# EAGLE board module_RevD_panelized (EAGLE 9.1.1), part 1 of 2
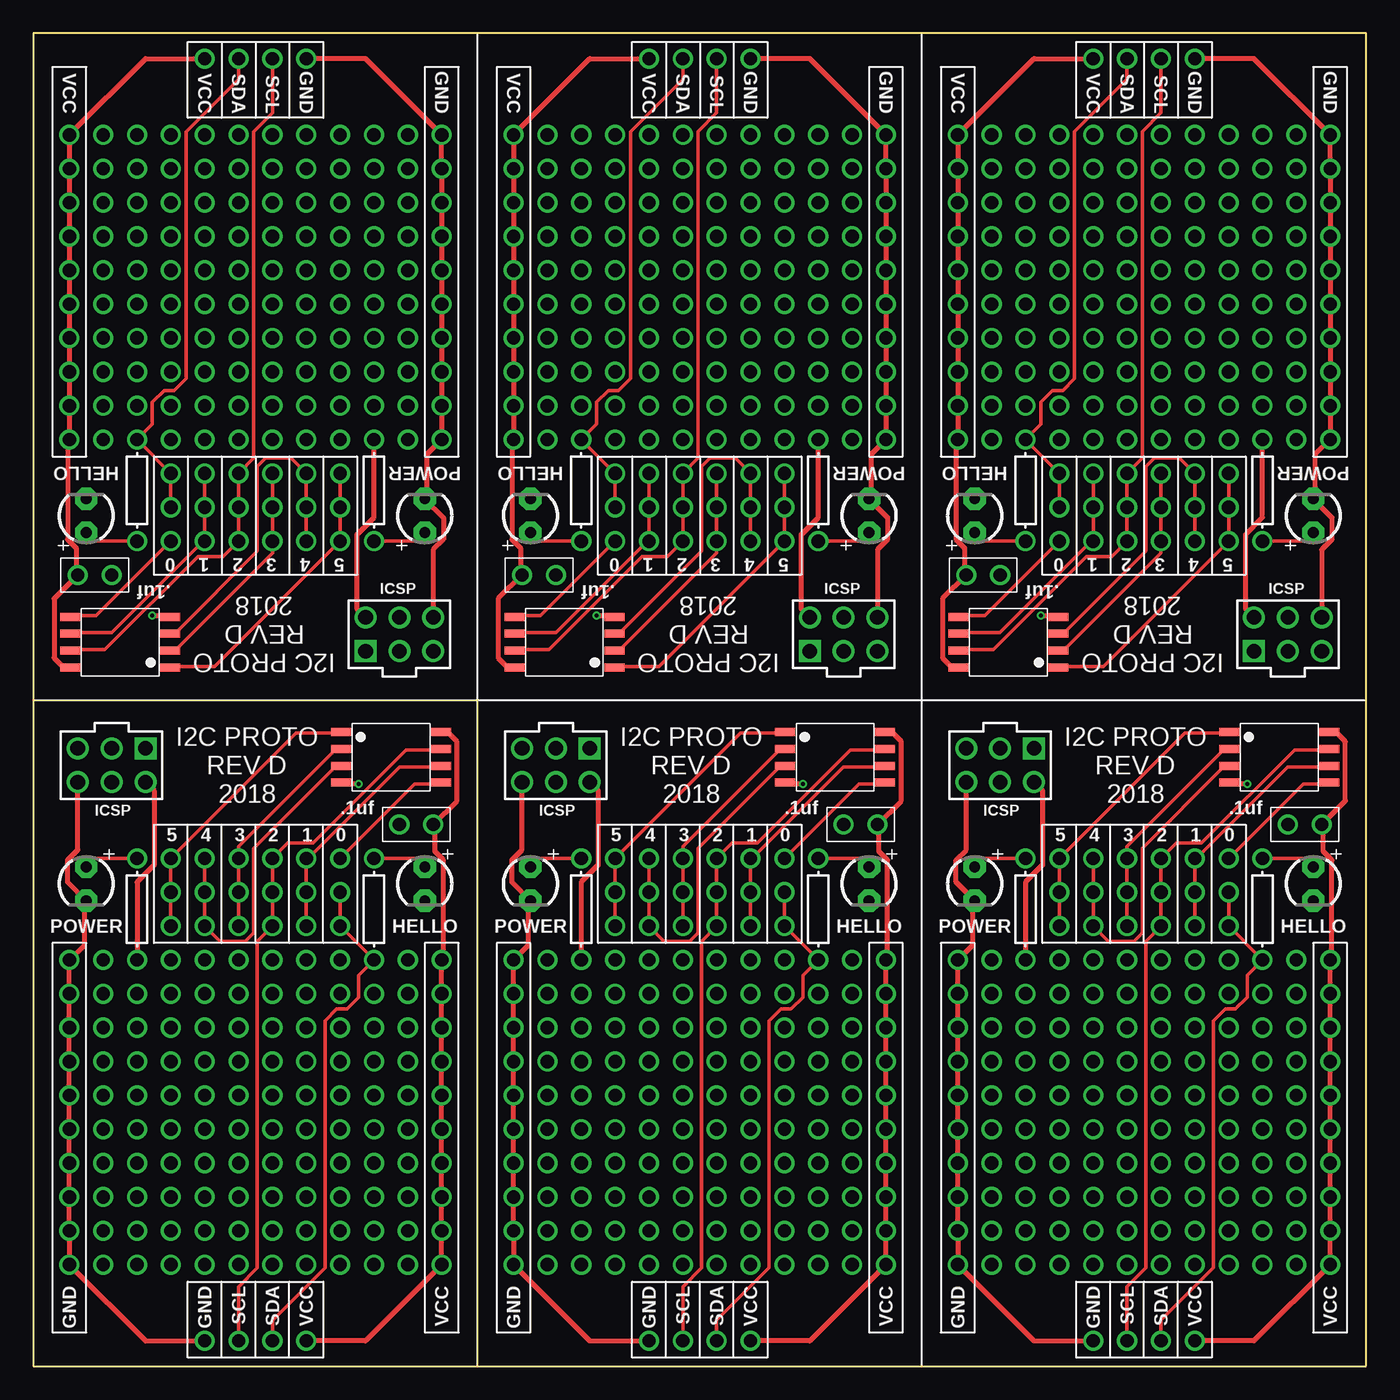
[diagram p0: board, top side]
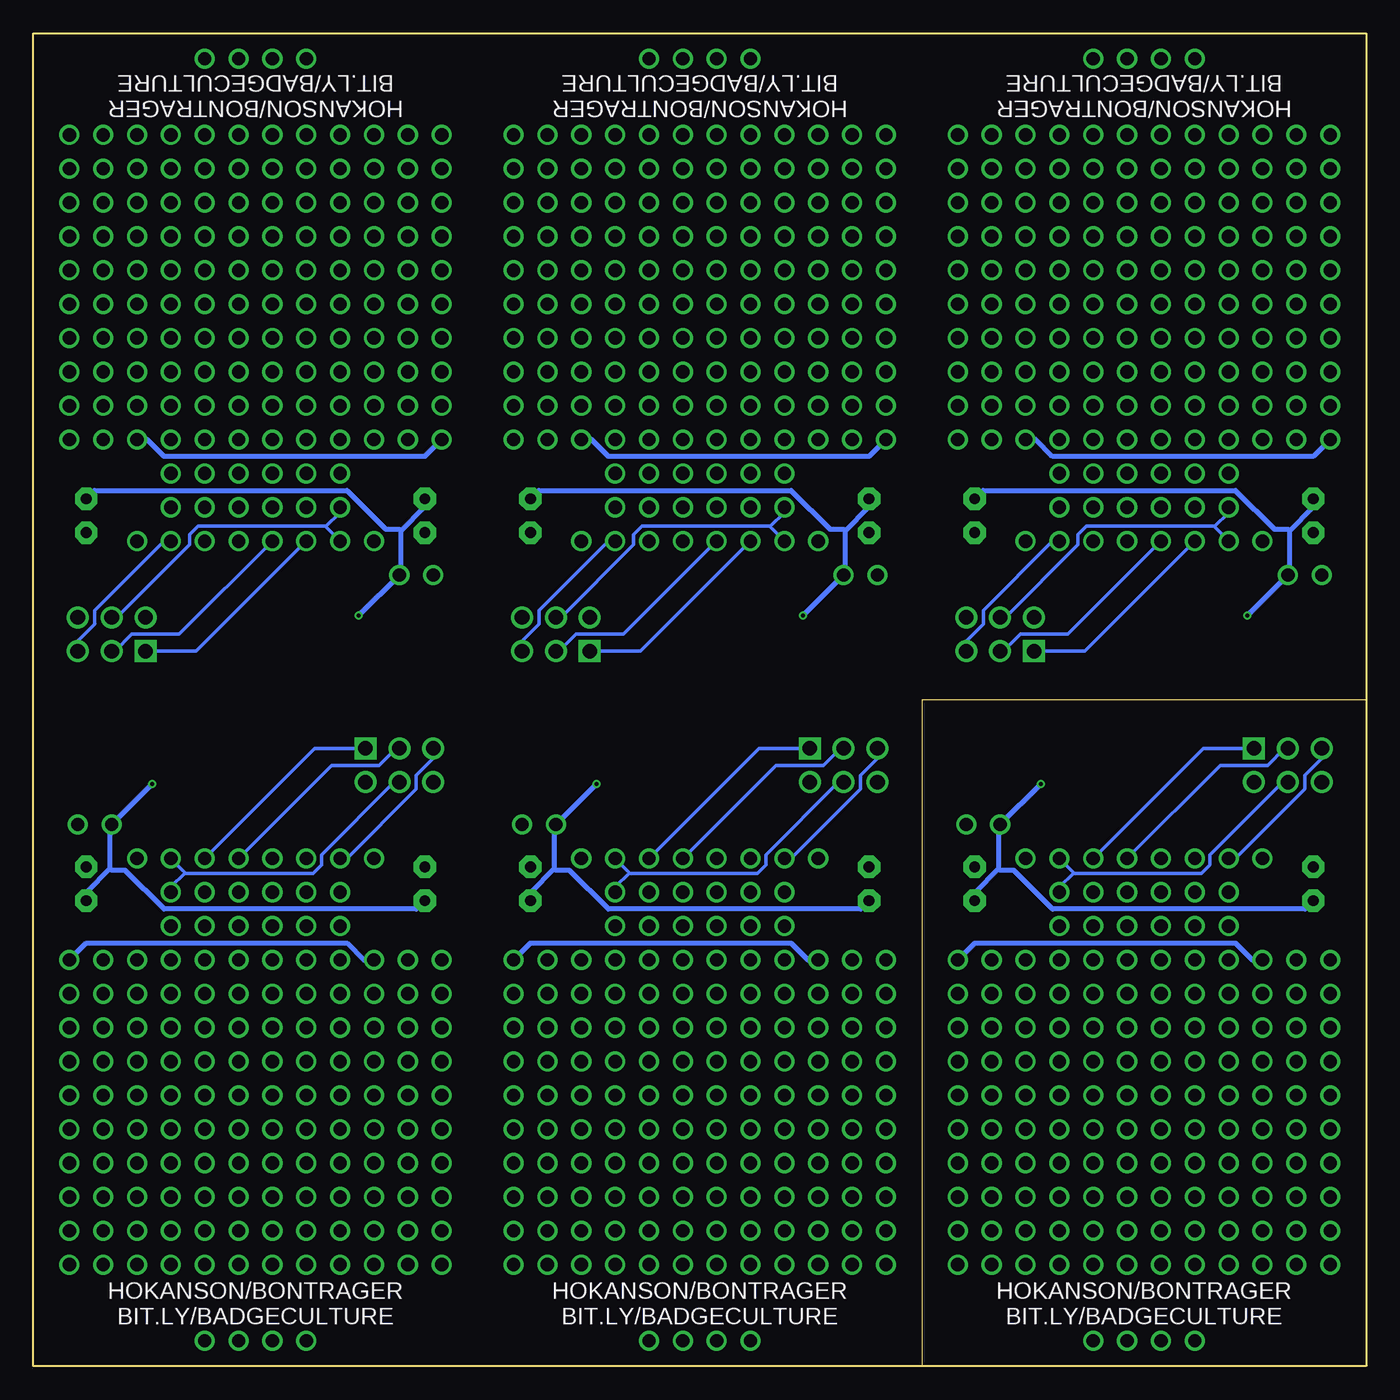
[diagram p1: board, bottom side, seen from below]

Size 100 x 100 mm. Coordinates in mm from the lower left corner, seen from the top.
Outline: 33.33,0 33.33,50 0,50
Outline: 0,0 100,0 100,100 0,100 0,0
Copper layers (1*16): Top 0.035mm / dielectric 1.5mm / Bottom 0.035mm
Design rules "Seeed_40mil_clearance *": minimum track width 6mil, minimum drill 12mil, track to track 6mil, track to pad 6mil, pad to pad 6mil, via to via 6mil, smd to smd 0mil, copper to edge 1.5mm, drill to drill 10mil, minimum pad ring 10mil, minimum via ring 6mil, stop-mask expansion 2mil, vias tented up to drill 100mil, thermal gap 10mil
Net classes: 0 default: width 0.254 mm, clearance 0.254 mm; 1 VCC: width 0.381 mm, clearance 0.254 mm; 2 GND: width 0.381 mm, clearance 0.254 mm

## Footprints (pad centres in the part's own frame; a part is rotated, then mirrored left to right if it is on the bottom)
LED3MM = drill 0.813 pad 1.676 octagon: NEG 1.27,0; POS -1.27,0
SOT127P798X216-8N = smd 1.5 x 0.6: GND -3.75,-1.905; PB0 3.75,-1.905; PB1 3.75,-0.635; PB2 3.75,0.635; PB3 -3.75,0.635; PB4 -3.75,-0.635; PB5 -3.75,1.905; VCC 3.75,1.905
HDRV6W64P254_2X3_762X508X868P = drill 1.1 pad 1.65: 0/MOSI/SDA 0,1.27; 2/SCK/SCL 0,3.81; 5/RST -2.54,3.81; GND -2.54,1.27; VCC 2.54,1.27 | drill 1.1 pad 1.65 square: 1/MISO 2.54,3.81
1X01 = drill 1: P$1 0,0
DECOUPLING_CAP = drill 1: P$1 0,0; P$2 2.54,0
AXIAL-0.3 = drill 1: P$3 -3.81,0; P$4 3.81,0

## Placement (x,y rotation side)
HELLO  LED3MM  [LED3MM]  29.37,36.2 270 top
HELLO1  LED3MM  [LED3MM]  62.7,36.2 270 top
HELLO2  LED3MM  [LED3MM]  96.03,36.2 270 top
HELLO3  LED3MM  [LED3MM]  70.63,63.8 90 top
HELLO4  LED3MM  [LED3MM]  37.3,63.8 90 top
HELLO5  LED3MM  [LED3MM]  3.97,63.8 90 top
IC1  ATTINY85-20SU  [SOT127P798X216-8N]  26.83,45.68 0 top
IC2  ATTINY85-20SU  [SOT127P798X216-8N]  60.16,45.68 0 top
IC3  ATTINY85-20SU  [SOT127P798X216-8N]  93.49,45.68 0 top
IC4  ATTINY85-20SU  [SOT127P798X216-8N]  73.17,54.32 180 top
IC5  ATTINY85-20SU  [SOT127P798X216-8N]  39.84,54.32 180 top
IC6  ATTINY85-20SU  [SOT127P798X216-8N]  6.51,54.32 180 top
J1  M20-9980346  [HDRV6W64P254_2X3_762X508X868P]  5.88,42.55 0 top
J2  M20-9980346  [HDRV6W64P254_2X3_762X508X868P]  39.2,42.55 0 top
J3  M20-9980346  [HDRV6W64P254_2X3_762X508X868P]  72.53,42.55 0 top
J4  M20-9980346  [HDRV6W64P254_2X3_762X508X868P]  94.12,57.45 180 top
J5  M20-9980346  [HDRV6W64P254_2X3_762X508X868P]  60.8,57.45 180 top
J6  M20-9980346  [HDRV6W64P254_2X3_762X508X868P]  27.46,57.45 180 top
POWER  LED3MM  [LED3MM]  3.97,36.2 270 top
POWER1  LED3MM  [LED3MM]  37.3,36.2 270 top
POWER2  LED3MM  [LED3MM]  70.63,36.2 270 top
POWER3  LED3MM  [LED3MM]  96.03,63.8 90 top
POWER4  LED3MM  [LED3MM]  62.7,63.8 90 top
POWER5  LED3MM  [LED3MM]  29.37,63.8 90 top
U$1  ONE_PAD  [1X01]  7.78,15.24 0 top
U$2  ONE_PAD  [1X01]  5.24,22.86 0 top
U$3  ONE_PAD  [1X01]  5.24,20.32 0 top
U$4  ONE_PAD  [1X01]  5.24,17.78 0 top
U$5  ONE_PAD  [1X01]  5.24,15.24 0 top
U$6  ONE_PAD  [1X01]  5.24,12.7 0 top
U$7  ONE_PAD  [1X01]  5.24,10.16 0 top
U$8  ONE_PAD  [1X01]  5.24,7.62 0 top
U$9  ONE_PAD  [1X01]  7.78,22.86 0 top
U$10  ONE_PAD  [1X01]  7.78,12.7 90 top
U$11  ONE_PAD  [1X01]  7.78,20.32 0 top
U$12  ONE_PAD  [1X01]  7.78,10.16 0 top
U$13  ONE_PAD  [1X01]  7.78,17.78 0 top
U$14  ONE_PAD  [1X01]  7.78,7.62 0 top
U$15  ONE_PAD  [1X01]  10.32,22.86 0 top
U$16  ONE_PAD  [1X01]  12.86,22.86 0 top
U$17  ONE_PAD  [1X01]  10.32,10.16 0 top
U$18  ONE_PAD  [1X01]  10.32,20.32 0 top
U$19  ONE_PAD  [1X01]  12.86,20.32 0 top
U$20  ONE_PAD  [1X01]  10.32,7.62 0 top
U$21  ONE_PAD  [1X01]  10.32,17.78 0 top
U$22  ONE_PAD  [1X01]  12.86,17.78 0 top
U$23  ONE_PAD  [1X01]  12.86,10.16 0 top
U$24  ONE_PAD  [1X01]  10.32,15.24 0 top
U$25  ONE_PAD  [1X01]  12.86,15.24 0 top
U$26  ONE_PAD  [1X01]  12.86,7.62 0 top
U$27  ONE_PAD  [1X01]  10.32,12.7 0 top
U$28  ONE_PAD  [1X01]  12.86,12.7 0 top
U$29  ONE_PAD  [1X01]  15.4,22.86 0 top
U$30  ONE_PAD  [1X01]  17.94,22.86 0 top
U$31  ONE_PAD  [1X01]  20.48,22.86 0 top
U$32  ONE_PAD  [1X01]  23.02,22.86 0 top
U$33  ONE_PAD  [1X01]  15.4,20.32 0 top
U$34  ONE_PAD  [1X01]  17.94,20.32 0 top
U$35  ONE_PAD  [1X01]  20.48,20.32 0 top
U$36  ONE_PAD  [1X01]  23.02,20.32 0 top
U$37  ONE_PAD  [1X01]  15.4,17.78 0 top
U$38  ONE_PAD  [1X01]  17.94,17.78 0 top
U$39  ONE_PAD  [1X01]  20.48,17.78 0 top
U$40  ONE_PAD  [1X01]  23.02,17.78 0 top
U$41  ONE_PAD  [1X01]  15.4,15.24 0 top
U$42  ONE_PAD  [1X01]  17.94,15.24 0 top
U$43  ONE_PAD  [1X01]  20.48,15.24 0 top
U$44  ONE_PAD  [1X01]  23.02,15.24 0 top
U$45  ONE_PAD  [1X01]  15.4,12.7 0 top
U$46  ONE_PAD  [1X01]  17.94,12.7 0 top
U$47  ONE_PAD  [1X01]  20.48,12.7 0 top
U$48  ONE_PAD  [1X01]  23.02,12.7 0 top
U$49  ONE_PAD  [1X01]  15.4,10.16 0 top
U$50  ONE_PAD  [1X01]  17.94,10.16 0 top
U$51  ONE_PAD  [1X01]  20.48,10.16 0 top
U$52  ONE_PAD  [1X01]  23.02,10.16 0 top
U$53  ONE_PAD  [1X01]  15.4,7.62 0 top
U$54  ONE_PAD  [1X01]  17.94,7.62 0 top
U$55  ONE_PAD  [1X01]  20.48,7.62 0 top
U$56  ONE_PAD  [1X01]  23.02,7.62 0 top
U$57  ONE_PAD  [1X01]  25.56,22.86 0 top
U$58  ONE_PAD  [1X01]  28.1,22.86 0 top
U$59  ONE_PAD  [1X01]  25.56,10.16 0 top
U$60  ONE_PAD  [1X01]  25.56,20.32 0 top
U$61  ONE_PAD  [1X01]  28.1,20.32 0 top
U$62  ONE_PAD  [1X01]  25.56,7.62 0 top
U$63  ONE_PAD  [1X01]  25.56,17.78 0 top
U$64  ONE_PAD  [1X01]  28.1,17.78 0 top
U$65  ONE_PAD  [1X01]  28.1,10.16 0 top
U$66  ONE_PAD  [1X01]  25.56,15.24 0 top
U$67  ONE_PAD  [1X01]  28.1,15.24 0 top
U$68  ONE_PAD  [1X01]  28.1,7.62 0 top
U$69  ONE_PAD  [1X01]  25.56,12.7 0 top
U$70  ONE_PAD  [1X01]  28.1,12.7 0 top
U$71  GND  [1X01]  12.86,1.91 180 top
U$72  SDA  [1X01]  17.94,1.91 0 top
U$73  SCL  [1X01]  15.4,1.91 0 top
U$74  VCC  [1X01]  20.48,1.91 90 top
U$75  ONE_PAD  [1X01]  23.02,38.1 0 top
U$76  ONE_PAD  [1X01]  23.02,35.56 0 top
U$77  ONE_PAD  [1X01]  23.02,33.02 0 top
U$78  ONE_PAD  [1X01]  20.48,38.1 0 top
U$79  ONE_PAD  [1X01]  20.48,35.56 0 top
U$80  ONE_PAD  [1X01]  20.48,33.02 0 top
U$81  ONE_PAD  [1X01]  17.94,38.1 0 top
U$82  ONE_PAD  [1X01]  17.94,33.02 0 top
U$83  ONE_PAD  [1X01]  17.94,35.56 0 top
U$84  ONE_PAD  [1X01]  15.4,38.1 0 top
U$85  ONE_PAD  [1X01]  15.4,33.02 0 top
U$86  ONE_PAD  [1X01]  15.4,35.56 0 top
U$87  ONE_PAD  [1X01]  12.86,35.56 0 top
U$88  ONE_PAD  [1X01]  12.86,38.1 0 top
U$89  ONE_PAD  [1X01]  12.86,33.02 0 top
U$90  ONE_PAD  [1X01]  10.32,35.56 0 top
U$91  ONE_PAD  [1X01]  10.32,38.1 0 top
U$92  ONE_PAD  [1X01]  10.32,33.02 0 top
U$93  ONE_PAD  [1X01]  5.24,25.4 90 top
U$94  ONE_PAD  [1X01]  5.24,27.94 90 top
U$95  ONE_PAD  [1X01]  5.24,30.48 90 top
U$96  ONE_PAD  [1X01]  23.02,30.48 90 top
U$97  ONE_PAD  [1X01]  7.78,25.4 90 top
U$98  ONE_PAD  [1X01]  7.78,27.94 90 top
U$99  ONE_PAD  [1X01]  2.7,17.78 0 top
U$100  ONE_PAD  [1X01]  2.7,30.48 0 top
U$101  ONE_PAD  [1X01]  10.32,25.4 90 top
U$102  ONE_PAD  [1X01]  10.32,27.94 90 top
U$103  ONE_PAD  [1X01]  10.32,30.48 90 top
U$104  ONE_PAD  [1X01]  28.1,30.48 90 top
U$105  ONE_PAD  [1X01]  12.86,25.4 90 top
U$106  ONE_PAD  [1X01]  12.86,27.94 90 top
U$107  ONE_PAD  [1X01]  12.86,30.48 90 top
U$108  ONE_PAD  [1X01]  25.56,27.94 90 top
U$109  ONE_PAD  [1X01]  15.4,25.4 90 top
U$110  ONE_PAD  [1X01]  15.4,27.94 90 top
U$111  ONE_PAD  [1X01]  15.4,30.48 90 top
U$112  ONE_PAD  [1X01]  28.1,27.94 90 top
U$113  ONE_PAD  [1X01]  17.94,25.4 90 top
U$114  ONE_PAD  [1X01]  17.94,27.94 90 top
U$115  ONE_PAD  [1X01]  17.94,30.48 90 top
U$116  ONE_PAD  [1X01]  25.56,25.4 90 top
U$117  ONE_PAD  [1X01]  20.48,25.4 90 top
U$118  ONE_PAD  [1X01]  20.48,27.94 90 top
U$119  ONE_PAD  [1X01]  20.48,30.48 90 top
U$120  ONE_PAD  [1X01]  28.1,25.4 90 top
U$121  ONE_PAD  [1X01]  23.02,25.4 90 top
U$122  ONE_PAD  [1X01]  23.02,27.94 90 top
U$123  DECOUPLING_CAP  [DECOUPLING_CAP]  27.46,40.64 0 top
U$124  ONE_PAD  [1X01]  2.7,15.24 0 top
U$125  ONE_PAD  [1X01]  2.7,27.94 0 top
U$126  RESISTOR  [AXIAL-0.3]  7.78,34.29 270 top
U$127  RESISTOR  [AXIAL-0.3]  25.56,34.29 270 top
U$128  ONE_PAD  [1X01]  2.7,12.7 0 top
U$129  ONE_PAD  [1X01]  2.7,25.4 0 top
U$130  ONE_PAD  [1X01]  2.7,10.16 0 top
U$131  ONE_PAD  [1X01]  2.7,22.86 0 top
U$132  ONE_PAD  [1X01]  2.7,7.62 0 top
U$133  ONE_PAD  [1X01]  2.7,20.32 0 top
U$134  ONE_PAD  [1X01]  30.64,17.78 0 top
U$135  ONE_PAD  [1X01]  30.64,30.48 0 top
U$136  ONE_PAD  [1X01]  30.64,15.24 0 top
U$137  ONE_PAD  [1X01]  30.64,27.94 0 top
U$138  ONE_PAD  [1X01]  30.64,12.7 0 top
U$139  ONE_PAD  [1X01]  30.64,25.4 0 top
U$140  ONE_PAD  [1X01]  30.64,10.16 0 top
U$141  ONE_PAD  [1X01]  30.64,22.86 0 top
U$142  ONE_PAD  [1X01]  30.64,7.62 0 top
U$143  ONE_PAD  [1X01]  30.64,20.32 0 top
U$144  ONE_PAD  [1X01]  38.57,22.86 0 top
U$145  ONE_PAD  [1X01]  38.57,20.32 0 top
U$146  ONE_PAD  [1X01]  38.57,17.78 0 top
U$147  ONE_PAD  [1X01]  38.57,15.24 0 top
U$148  ONE_PAD  [1X01]  38.57,12.7 0 top
U$149  ONE_PAD  [1X01]  38.57,10.16 0 top
U$150  ONE_PAD  [1X01]  38.57,7.62 0 top
U$151  ONE_PAD  [1X01]  41.11,15.24 0 top
U$152  ONE_PAD  [1X01]  41.11,22.86 0 top
U$153  ONE_PAD  [1X01]  41.11,12.7 90 top
U$154  ONE_PAD  [1X01]  41.11,20.32 0 top
U$155  ONE_PAD  [1X01]  41.11,10.16 0 top
U$156  ONE_PAD  [1X01]  41.11,17.78 0 top
U$157  ONE_PAD  [1X01]  41.11,7.62 0 top
U$158  ONE_PAD  [1X01]  43.65,22.86 0 top
U$159  ONE_PAD  [1X01]  46.19,22.86 0 top
U$160  ONE_PAD  [1X01]  43.65,10.16 0 top
U$161  ONE_PAD  [1X01]  43.65,20.32 0 top
U$162  ONE_PAD  [1X01]  46.19,20.32 0 top
U$163  ONE_PAD  [1X01]  43.65,7.62 0 top
U$164  ONE_PAD  [1X01]  43.65,17.78 0 top
U$165  ONE_PAD  [1X01]  46.19,17.78 0 top
U$166  ONE_PAD  [1X01]  46.19,10.16 0 top
U$167  ONE_PAD  [1X01]  43.65,15.24 0 top
U$168  ONE_PAD  [1X01]  46.19,15.24 0 top
U$169  ONE_PAD  [1X01]  46.19,7.62 0 top
U$170  ONE_PAD  [1X01]  43.65,12.7 0 top
U$171  ONE_PAD  [1X01]  46.19,12.7 0 top
U$172  ONE_PAD  [1X01]  48.73,22.86 0 top
U$173  ONE_PAD  [1X01]  51.27,22.86 0 top
U$174  ONE_PAD  [1X01]  53.81,22.86 0 top
U$175  ONE_PAD  [1X01]  56.35,22.86 0 top
U$176  ONE_PAD  [1X01]  48.73,20.32 0 top
U$177  ONE_PAD  [1X01]  51.27,20.32 0 top
U$178  ONE_PAD  [1X01]  53.81,20.32 0 top
U$179  ONE_PAD  [1X01]  56.35,20.32 0 top
U$180  ONE_PAD  [1X01]  48.73,17.78 0 top
U$181  ONE_PAD  [1X01]  51.27,17.78 0 top
U$182  ONE_PAD  [1X01]  53.81,17.78 0 top
U$183  ONE_PAD  [1X01]  56.35,17.78 0 top
U$184  ONE_PAD  [1X01]  48.73,15.24 0 top
U$185  ONE_PAD  [1X01]  51.27,15.24 0 top
U$186  ONE_PAD  [1X01]  53.81,15.24 0 top
U$187  ONE_PAD  [1X01]  56.35,15.24 0 top
U$188  ONE_PAD  [1X01]  48.73,12.7 0 top
U$189  ONE_PAD  [1X01]  51.27,12.7 0 top
U$190  ONE_PAD  [1X01]  53.81,12.7 0 top
U$191  ONE_PAD  [1X01]  56.35,12.7 0 top
U$192  ONE_PAD  [1X01]  48.73,10.16 0 top
U$193  ONE_PAD  [1X01]  51.27,10.16 0 top
U$194  ONE_PAD  [1X01]  53.81,10.16 0 top
U$195  ONE_PAD  [1X01]  56.35,10.16 0 top
U$196  ONE_PAD  [1X01]  48.73,7.62 0 top
U$197  ONE_PAD  [1X01]  51.27,7.62 0 top
U$198  ONE_PAD  [1X01]  53.81,7.62 0 top
U$199  ONE_PAD  [1X01]  56.35,7.62 0 top
U$200  ONE_PAD  [1X01]  58.89,22.86 0 top
U$201  ONE_PAD  [1X01]  61.43,22.86 0 top
U$202  ONE_PAD  [1X01]  58.89,10.16 0 top
U$203  ONE_PAD  [1X01]  58.89,20.32 0 top
U$204  ONE_PAD  [1X01]  61.43,20.32 0 top
U$205  ONE_PAD  [1X01]  58.89,7.62 0 top
U$206  ONE_PAD  [1X01]  58.89,17.78 0 top
U$207  ONE_PAD  [1X01]  61.43,17.78 0 top
U$208  ONE_PAD  [1X01]  61.43,10.16 0 top
U$209  ONE_PAD  [1X01]  58.89,15.24 0 top
U$210  ONE_PAD  [1X01]  61.43,15.24 0 top
U$211  ONE_PAD  [1X01]  61.43,7.62 0 top
U$212  ONE_PAD  [1X01]  58.89,12.7 0 top
U$213  ONE_PAD  [1X01]  61.43,12.7 0 top
U$214  GND  [1X01]  46.19,1.91 180 top
U$215  VCC  [1X01]  53.81,1.91 90 top
U$216  SDA  [1X01]  51.27,1.91 0 top
U$217  SCL  [1X01]  48.73,1.91 0 top
U$218  ONE_PAD  [1X01]  56.35,38.1 0 top
U$219  ONE_PAD  [1X01]  56.35,35.56 0 top
U$220  ONE_PAD  [1X01]  56.35,33.02 0 top
U$221  ONE_PAD  [1X01]  53.81,38.1 0 top
U$222  ONE_PAD  [1X01]  53.81,35.56 0 top
U$223  ONE_PAD  [1X01]  53.81,33.02 0 top
U$224  ONE_PAD  [1X01]  51.27,38.1 0 top
U$225  ONE_PAD  [1X01]  51.27,33.02 0 top
U$226  ONE_PAD  [1X01]  51.27,35.56 0 top
U$227  ONE_PAD  [1X01]  48.73,38.1 0 top
U$228  ONE_PAD  [1X01]  48.73,33.02 0 top
U$229  ONE_PAD  [1X01]  48.73,35.56 0 top
U$230  ONE_PAD  [1X01]  46.19,35.56 0 top
U$231  ONE_PAD  [1X01]  46.19,38.1 0 top
U$232  ONE_PAD  [1X01]  46.19,33.02 0 top
U$233  ONE_PAD  [1X01]  43.65,35.56 0 top
U$234  ONE_PAD  [1X01]  43.65,38.1 0 top
U$235  ONE_PAD  [1X01]  43.65,33.02 0 top
U$236  ONE_PAD  [1X01]  38.57,25.4 90 top
U$237  ONE_PAD  [1X01]  38.57,27.94 90 top
U$238  ONE_PAD  [1X01]  38.57,30.48 90 top
U$239  ONE_PAD  [1X01]  56.35,30.48 90 top
U$240  ONE_PAD  [1X01]  41.11,25.4 90 top
U$241  ONE_PAD  [1X01]  41.11,27.94 90 top
U$242  ONE_PAD  [1X01]  43.65,25.4 90 top
U$243  ONE_PAD  [1X01]  43.65,27.94 90 top
U$244  ONE_PAD  [1X01]  43.65,30.48 90 top
U$245  ONE_PAD  [1X01]  61.43,30.48 90 top
U$246  ONE_PAD  [1X01]  46.19,25.4 90 top
U$247  ONE_PAD  [1X01]  46.19,27.94 90 top
U$248  ONE_PAD  [1X01]  46.19,30.48 90 top
U$249  ONE_PAD  [1X01]  58.89,27.94 90 top
U$250  ONE_PAD  [1X01]  48.73,25.4 90 top
U$251  ONE_PAD  [1X01]  48.73,27.94 90 top
U$252  ONE_PAD  [1X01]  48.73,30.48 90 top
U$253  ONE_PAD  [1X01]  61.43,27.94 90 top
U$254  ONE_PAD  [1X01]  51.27,25.4 90 top
U$255  ONE_PAD  [1X01]  51.27,27.94 90 top
U$256  ONE_PAD  [1X01]  51.27,30.48 90 top
U$257  ONE_PAD  [1X01]  58.89,25.4 90 top
U$258  ONE_PAD  [1X01]  53.81,25.4 90 top
U$259  ONE_PAD  [1X01]  53.81,27.94 90 top
U$260  ONE_PAD  [1X01]  53.81,30.48 90 top
U$261  ONE_PAD  [1X01]  61.43,25.4 90 top
U$262  ONE_PAD  [1X01]  56.35,25.4 90 top
U$263  ONE_PAD  [1X01]  56.35,27.94 90 top
U$264  DECOUPLING_CAP  [DECOUPLING_CAP]  60.8,40.64 0 top
U$265  RESISTOR  [AXIAL-0.3]  41.11,34.29 270 top
U$266  RESISTOR  [AXIAL-0.3]  58.89,34.29 270 top
U$267  ONE_PAD  [1X01]  36.03,17.78 0 top
U$268  ONE_PAD  [1X01]  36.03,30.48 0 top
U$269  ONE_PAD  [1X01]  36.03,15.24 0 top
U$270  ONE_PAD  [1X01]  36.03,27.94 0 top
U$271  ONE_PAD  [1X01]  36.03,12.7 0 top
U$272  ONE_PAD  [1X01]  36.03,25.4 0 top
U$273  ONE_PAD  [1X01]  36.03,10.16 0 top
U$274  ONE_PAD  [1X01]  36.03,22.86 0 top
U$275  ONE_PAD  [1X01]  36.03,7.62 0 top
U$276  ONE_PAD  [1X01]  36.03,20.32 0 top
U$277  ONE_PAD  [1X01]  63.97,17.78 0 top
U$278  ONE_PAD  [1X01]  63.97,30.48 0 top
U$279  ONE_PAD  [1X01]  63.97,15.24 0 top
U$280  ONE_PAD  [1X01]  63.97,27.94 0 top
U$281  ONE_PAD  [1X01]  63.97,12.7 0 top
U$282  ONE_PAD  [1X01]  63.97,25.4 0 top
U$283  ONE_PAD  [1X01]  63.97,10.16 0 top
U$284  ONE_PAD  [1X01]  63.97,22.86 0 top
U$285  ONE_PAD  [1X01]  63.97,7.62 0 top
U$286  ONE_PAD  [1X01]  63.97,20.32 0 top
U$287  ONE_PAD  [1X01]  71.9,22.86 0 top
U$288  ONE_PAD  [1X01]  71.9,20.32 0 top
U$289  ONE_PAD  [1X01]  71.9,17.78 0 top
U$290  ONE_PAD  [1X01]  71.9,15.24 0 top
U$291  ONE_PAD  [1X01]  71.9,12.7 0 top
U$292  ONE_PAD  [1X01]  71.9,10.16 0 top
U$293  ONE_PAD  [1X01]  71.9,7.62 0 top
U$294  ONE_PAD  [1X01]  74.44,15.24 0 top
U$295  ONE_PAD  [1X01]  74.44,22.86 0 top
U$296  ONE_PAD  [1X01]  74.44,12.7 90 top
U$297  ONE_PAD  [1X01]  74.44,20.32 0 top
U$298  ONE_PAD  [1X01]  74.44,10.16 0 top
U$299  ONE_PAD  [1X01]  74.44,17.78 0 top
U$300  ONE_PAD  [1X01]  74.44,7.62 0 top
U$301  ONE_PAD  [1X01]  76.98,22.86 0 top
U$302  ONE_PAD  [1X01]  79.52,22.86 0 top
U$303  ONE_PAD  [1X01]  76.98,10.16 0 top
U$304  ONE_PAD  [1X01]  76.98,20.32 0 top
U$305  ONE_PAD  [1X01]  79.52,20.32 0 top
U$306  ONE_PAD  [1X01]  76.98,7.62 0 top
U$307  ONE_PAD  [1X01]  76.98,17.78 0 top
U$308  ONE_PAD  [1X01]  79.52,17.78 0 top
U$309  ONE_PAD  [1X01]  79.52,10.16 0 top
U$310  ONE_PAD  [1X01]  76.98,15.24 0 top
U$311  ONE_PAD  [1X01]  79.52,15.24 0 top
U$312  ONE_PAD  [1X01]  79.52,7.62 0 top
U$313  ONE_PAD  [1X01]  76.98,12.7 0 top
U$314  ONE_PAD  [1X01]  79.52,12.7 0 top
U$315  ONE_PAD  [1X01]  82.06,22.86 0 top
U$316  ONE_PAD  [1X01]  84.6,22.86 0 top
U$317  ONE_PAD  [1X01]  87.14,22.86 0 top
U$318  ONE_PAD  [1X01]  89.68,22.86 0 top
U$319  ONE_PAD  [1X01]  82.06,20.32 0 top
U$320  ONE_PAD  [1X01]  84.6,20.32 0 top
U$321  ONE_PAD  [1X01]  87.14,20.32 0 top
U$322  ONE_PAD  [1X01]  89.68,20.32 0 top
U$323  ONE_PAD  [1X01]  82.06,17.78 0 top
U$324  ONE_PAD  [1X01]  84.6,17.78 0 top
U$325  ONE_PAD  [1X01]  87.14,17.78 0 top
U$326  ONE_PAD  [1X01]  89.68,17.78 0 top
U$327  ONE_PAD  [1X01]  82.06,15.24 0 top
U$328  ONE_PAD  [1X01]  84.6,15.24 0 top
U$329  ONE_PAD  [1X01]  87.14,15.24 0 top
U$330  ONE_PAD  [1X01]  89.68,15.24 0 top
U$331  ONE_PAD  [1X01]  82.06,12.7 0 top
U$332  ONE_PAD  [1X01]  84.6,12.7 0 top
U$333  ONE_PAD  [1X01]  87.14,12.7 0 top
U$334  ONE_PAD  [1X01]  89.68,12.7 0 top
U$335  ONE_PAD  [1X01]  82.06,10.16 0 top
U$336  ONE_PAD  [1X01]  84.6,10.16 0 top
U$337  ONE_PAD  [1X01]  87.14,10.16 0 top
U$338  ONE_PAD  [1X01]  89.68,10.16 0 top
U$339  ONE_PAD  [1X01]  82.06,7.62 0 top
U$340  ONE_PAD  [1X01]  84.6,7.62 0 top
U$341  ONE_PAD  [1X01]  87.14,7.62 0 top
U$342  ONE_PAD  [1X01]  89.68,7.62 0 top
U$343  ONE_PAD  [1X01]  92.22,22.86 0 top
U$344  ONE_PAD  [1X01]  94.76,22.86 0 top
U$345  ONE_PAD  [1X01]  92.22,10.16 0 top
U$346  ONE_PAD  [1X01]  92.22,20.32 0 top
U$347  ONE_PAD  [1X01]  94.76,20.32 0 top
U$348  ONE_PAD  [1X01]  92.22,7.62 0 top
U$349  ONE_PAD  [1X01]  92.22,17.78 0 top
U$350  ONE_PAD  [1X01]  94.76,17.78 0 top
U$351  ONE_PAD  [1X01]  94.76,10.16 0 top
U$352  ONE_PAD  [1X01]  92.22,15.24 0 top
U$353  ONE_PAD  [1X01]  94.76,15.24 0 top
U$354  ONE_PAD  [1X01]  94.76,7.62 0 top
U$355  ONE_PAD  [1X01]  92.22,12.7 0 top
U$356  ONE_PAD  [1X01]  94.76,12.7 0 top
U$357  GND  [1X01]  79.52,1.91 180 top
U$358  VCC  [1X01]  87.14,1.91 90 top
U$359  SDA  [1X01]  84.6,1.91 0 top
U$360  SCL  [1X01]  82.06,1.91 0 top
U$361  ONE_PAD  [1X01]  89.68,38.1 0 top
U$362  ONE_PAD  [1X01]  89.68,35.56 0 top
U$363  ONE_PAD  [1X01]  89.68,33.02 0 top
U$364  ONE_PAD  [1X01]  87.14,38.1 0 top
U$365  ONE_PAD  [1X01]  87.14,35.56 0 top
U$366  ONE_PAD  [1X01]  87.14,33.02 0 top
U$367  ONE_PAD  [1X01]  84.6,38.1 0 top
U$368  ONE_PAD  [1X01]  84.6,33.02 0 top
U$369  ONE_PAD  [1X01]  84.6,35.56 0 top
U$370  ONE_PAD  [1X01]  82.06,38.1 0 top
U$371  ONE_PAD  [1X01]  82.06,33.02 0 top
U$372  ONE_PAD  [1X01]  82.06,35.56 0 top
U$373  ONE_PAD  [1X01]  79.52,35.56 0 top
U$374  ONE_PAD  [1X01]  79.52,38.1 0 top
U$375  ONE_PAD  [1X01]  79.52,33.02 0 top
U$376  ONE_PAD  [1X01]  76.98,35.56 0 top
U$377  ONE_PAD  [1X01]  76.98,38.1 0 top
U$378  ONE_PAD  [1X01]  76.98,33.02 0 top
U$379  ONE_PAD  [1X01]  71.9,25.4 90 top
U$380  ONE_PAD  [1X01]  71.9,27.94 90 top
U$381  ONE_PAD  [1X01]  71.9,30.48 90 top
U$382  ONE_PAD  [1X01]  89.68,30.48 90 top
U$383  ONE_PAD  [1X01]  74.44,25.4 90 top
U$384  ONE_PAD  [1X01]  74.44,27.94 90 top
U$385  ONE_PAD  [1X01]  76.98,25.4 90 top
U$386  ONE_PAD  [1X01]  76.98,27.94 90 top
U$387  ONE_PAD  [1X01]  76.98,30.48 90 top
U$388  ONE_PAD  [1X01]  94.76,30.48 90 top
U$389  ONE_PAD  [1X01]  79.52,25.4 90 top
U$390  ONE_PAD  [1X01]  79.52,27.94 90 top
U$391  ONE_PAD  [1X01]  79.52,30.48 90 top
U$392  ONE_PAD  [1X01]  92.22,27.94 90 top
U$393  ONE_PAD  [1X01]  82.06,25.4 90 top
U$394  ONE_PAD  [1X01]  82.06,27.94 90 top
U$395  ONE_PAD  [1X01]  82.06,30.48 90 top
U$396  ONE_PAD  [1X01]  94.76,27.94 90 top
U$397  ONE_PAD  [1X01]  84.6,25.4 90 top
U$398  ONE_PAD  [1X01]  84.6,27.94 90 top
U$399  ONE_PAD  [1X01]  84.6,30.48 90 top
U$400  ONE_PAD  [1X01]  92.22,25.4 90 top
U$401  ONE_PAD  [1X01]  87.14,25.4 90 top
U$402  ONE_PAD  [1X01]  87.14,27.94 90 top
U$403  ONE_PAD  [1X01]  87.14,30.48 90 top
U$404  ONE_PAD  [1X01]  94.76,25.4 90 top
U$405  ONE_PAD  [1X01]  89.68,25.4 90 top
U$406  ONE_PAD  [1X01]  89.68,27.94 90 top
U$407  DECOUPLING_CAP  [DECOUPLING_CAP]  94.12,40.64 0 top
U$408  RESISTOR  [AXIAL-0.3]  74.44,34.29 270 top
U$409  RESISTOR  [AXIAL-0.3]  92.22,34.29 270 top
U$410  ONE_PAD  [1X01]  69.36,17.78 0 top
U$411  ONE_PAD  [1X01]  69.36,30.48 0 top
U$412  ONE_PAD  [1X01]  69.36,15.24 0 top
U$413  ONE_PAD  [1X01]  69.36,27.94 0 top
U$414  ONE_PAD  [1X01]  69.36,12.7 0 top
U$415  ONE_PAD  [1X01]  69.36,25.4 0 top
U$416  ONE_PAD  [1X01]  69.36,10.16 0 top
U$417  ONE_PAD  [1X01]  69.36,22.86 0 top
U$418  ONE_PAD  [1X01]  69.36,7.62 0 top
U$419  ONE_PAD  [1X01]  69.36,20.32 0 top
U$420  ONE_PAD  [1X01]  97.3,17.78 0 top
U$421  ONE_PAD  [1X01]  97.3,30.48 0 top
U$422  ONE_PAD  [1X01]  97.3,15.24 0 top
U$423  ONE_PAD  [1X01]  97.3,27.94 0 top
U$424  ONE_PAD  [1X01]  97.3,12.7 0 top
U$425  ONE_PAD  [1X01]  97.3,25.4 0 top
U$426  ONE_PAD  [1X01]  97.3,10.16 0 top
U$427  ONE_PAD  [1X01]  97.3,22.86 0 top
U$428  ONE_PAD  [1X01]  97.3,7.62 0 top
U$429  ONE_PAD  [1X01]  97.3,20.32 0 top
U$430  ONE_PAD  [1X01]  94.76,77.14 180 top
U$431  ONE_PAD  [1X01]  94.76,79.68 180 top
U$432  ONE_PAD  [1X01]  94.76,82.22 180 top
U$433  ONE_PAD  [1X01]  94.76,84.76 180 top
U$434  ONE_PAD  [1X01]  94.76,87.3 180 top
U$435  ONE_PAD  [1X01]  94.76,89.84 180 top
U$436  ONE_PAD  [1X01]  94.76,92.38 180 top
U$437  ONE_PAD  [1X01]  92.22,84.76 180 top
U$438  ONE_PAD  [1X01]  92.22,77.14 180 top
U$439  ONE_PAD  [1X01]  92.22,87.3 270 top
U$440  ONE_PAD  [1X01]  92.22,79.68 180 top
U$441  ONE_PAD  [1X01]  92.22,89.84 180 top
U$442  ONE_PAD  [1X01]  92.22,82.22 180 top
U$443  ONE_PAD  [1X01]  92.22,92.38 180 top
U$444  ONE_PAD  [1X01]  89.68,77.14 180 top
U$445  ONE_PAD  [1X01]  87.14,77.14 180 top
U$446  ONE_PAD  [1X01]  89.68,89.84 180 top
U$447  ONE_PAD  [1X01]  89.68,79.68 180 top
U$448  ONE_PAD  [1X01]  87.14,79.68 180 top
U$449  ONE_PAD  [1X01]  89.68,92.38 180 top
U$450  ONE_PAD  [1X01]  89.68,82.22 180 top
U$451  ONE_PAD  [1X01]  87.14,82.22 180 top
U$452  ONE_PAD  [1X01]  87.14,89.84 180 top
U$453  ONE_PAD  [1X01]  89.68,84.76 180 top
U$454  ONE_PAD  [1X01]  87.14,84.76 180 top
U$455  ONE_PAD  [1X01]  87.14,92.38 180 top
U$456  ONE_PAD  [1X01]  89.68,87.3 180 top
U$457  ONE_PAD  [1X01]  87.14,87.3 180 top
U$458  ONE_PAD  [1X01]  84.6,77.14 180 top
U$459  ONE_PAD  [1X01]  82.06,77.14 180 top
U$460  ONE_PAD  [1X01]  79.52,77.14 180 top
U$461  ONE_PAD  [1X01]  76.98,77.14 180 top
U$462  ONE_PAD  [1X01]  84.6,79.68 180 top
U$463  ONE_PAD  [1X01]  82.06,79.68 180 top
U$464  ONE_PAD  [1X01]  79.52,79.68 180 top
U$465  ONE_PAD  [1X01]  76.98,79.68 180 top
U$466  ONE_PAD  [1X01]  84.6,82.22 180 top
U$467  ONE_PAD  [1X01]  82.06,82.22 180 top
U$468  ONE_PAD  [1X01]  79.52,82.22 180 top
U$469  ONE_PAD  [1X01]  76.98,82.22 180 top
U$470  ONE_PAD  [1X01]  84.6,84.76 180 top
U$471  ONE_PAD  [1X01]  82.06,84.76 180 top
U$472  ONE_PAD  [1X01]  79.52,84.76 180 top
U$473  ONE_PAD  [1X01]  76.98,84.76 180 top
U$474  ONE_PAD  [1X01]  84.6,87.3 180 top
U$475  ONE_PAD  [1X01]  82.06,87.3 180 top
U$476  ONE_PAD  [1X01]  79.52,87.3 180 top
U$477  ONE_PAD  [1X01]  76.98,87.3 180 top
U$478  ONE_PAD  [1X01]  84.6,89.84 180 top
U$479  ONE_PAD  [1X01]  82.06,89.84 180 top
U$480  ONE_PAD  [1X01]  79.52,89.84 180 top
U$481  ONE_PAD  [1X01]  76.98,89.84 180 top
U$482  ONE_PAD  [1X01]  84.6,92.38 180 top
U$483  ONE_PAD  [1X01]  82.06,92.38 180 top
U$484  ONE_PAD  [1X01]  79.52,92.38 180 top
U$485  ONE_PAD  [1X01]  76.98,92.38 180 top
U$486  ONE_PAD  [1X01]  74.44,77.14 180 top
U$487  ONE_PAD  [1X01]  71.9,77.14 180 top
U$488  ONE_PAD  [1X01]  74.44,89.84 180 top
U$489  ONE_PAD  [1X01]  74.44,79.68 180 top
U$490  ONE_PAD  [1X01]  71.9,79.68 180 top
U$491  ONE_PAD  [1X01]  74.44,92.38 180 top
U$492  ONE_PAD  [1X01]  74.44,82.22 180 top
U$493  ONE_PAD  [1X01]  71.9,82.22 180 top
U$494  ONE_PAD  [1X01]  71.9,89.84 180 top
U$495  ONE_PAD  [1X01]  74.44,84.76 180 top
U$496  ONE_PAD  [1X01]  71.9,84.76 180 top
U$497  ONE_PAD  [1X01]  71.9,92.38 180 top
U$498  ONE_PAD  [1X01]  74.44,87.3 180 top
U$499  ONE_PAD  [1X01]  71.9,87.3 180 top
U$500  GND  [1X01]  87.14,98.09 0 top
U$501  VCC  [1X01]  79.52,98.09 270 top
U$502  SDA  [1X01]  82.06,98.09 180 top
U$503  SCL  [1X01]  84.6,98.09 180 top
U$504  ONE_PAD  [1X01]  76.98,61.9 180 top
U$505  ONE_PAD  [1X01]  76.98,64.44 180 top
U$506  ONE_PAD  [1X01]  76.98,66.98 180 top
U$507  ONE_PAD  [1X01]  79.52,61.9 180 top
U$508  ONE_PAD  [1X01]  79.52,64.44 180 top
U$509  ONE_PAD  [1X01]  79.52,66.98 180 top
U$510  ONE_PAD  [1X01]  82.06,61.9 180 top
U$511  ONE_PAD  [1X01]  82.06,66.98 180 top
U$512  ONE_PAD  [1X01]  82.06,64.44 180 top
U$513  ONE_PAD  [1X01]  84.6,61.9 180 top
U$514  ONE_PAD  [1X01]  84.6,66.98 180 top
U$515  ONE_PAD  [1X01]  84.6,64.44 180 top
U$516  ONE_PAD  [1X01]  87.14,64.44 180 top
U$517  ONE_PAD  [1X01]  87.14,61.9 180 top
U$518  ONE_PAD  [1X01]  87.14,66.98 180 top
U$519  ONE_PAD  [1X01]  89.68,64.44 180 top
U$520  ONE_PAD  [1X01]  89.68,61.9 180 top
U$521  ONE_PAD  [1X01]  89.68,66.98 180 top
U$522  ONE_PAD  [1X01]  94.76,74.6 270 top
U$523  ONE_PAD  [1X01]  94.76,72.06 270 top
U$524  ONE_PAD  [1X01]  94.76,69.52 270 top
U$525  ONE_PAD  [1X01]  76.98,69.52 270 top
U$526  ONE_PAD  [1X01]  92.22,74.6 270 top
U$527  ONE_PAD  [1X01]  92.22,72.06 270 top
U$528  ONE_PAD  [1X01]  89.68,74.6 270 top
U$529  ONE_PAD  [1X01]  89.68,72.06 270 top
U$530  ONE_PAD  [1X01]  89.68,69.52 270 top
U$531  ONE_PAD  [1X01]  71.9,69.52 270 top
U$532  ONE_PAD  [1X01]  87.14,74.6 270 top
U$533  ONE_PAD  [1X01]  87.14,72.06 270 top
U$534  ONE_PAD  [1X01]  87.14,69.52 270 top
U$535  ONE_PAD  [1X01]  74.44,72.06 270 top
U$536  ONE_PAD  [1X01]  84.6,74.6 270 top
U$537  ONE_PAD  [1X01]  84.6,72.06 270 top
U$538  ONE_PAD  [1X01]  84.6,69.52 270 top
U$539  ONE_PAD  [1X01]  71.9,72.06 270 top
U$540  ONE_PAD  [1X01]  82.06,74.6 270 top
U$541  ONE_PAD  [1X01]  82.06,72.06 270 top
U$542  ONE_PAD  [1X01]  82.06,69.52 270 top
U$543  ONE_PAD  [1X01]  74.44,74.6 270 top
U$544  ONE_PAD  [1X01]  79.52,74.6 270 top
U$545  ONE_PAD  [1X01]  79.52,72.06 270 top
U$546  ONE_PAD  [1X01]  79.52,69.52 270 top
U$547  ONE_PAD  [1X01]  71.9,74.6 270 top
U$548  ONE_PAD  [1X01]  76.98,74.6 270 top
U$549  ONE_PAD  [1X01]  76.98,72.06 270 top
U$550  DECOUPLING_CAP  [DECOUPLING_CAP]  72.53,59.36 180 top
U$551  RESISTOR  [AXIAL-0.3]  92.22,65.71 90 top
U$552  RESISTOR  [AXIAL-0.3]  74.44,65.71 90 top
U$553  ONE_PAD  [1X01]  97.3,82.22 180 top
U$554  ONE_PAD  [1X01]  97.3,69.52 180 top
U$555  ONE_PAD  [1X01]  97.3,84.76 180 top
U$556  ONE_PAD  [1X01]  97.3,72.06 180 top
U$557  ONE_PAD  [1X01]  97.3,87.3 180 top
U$558  ONE_PAD  [1X01]  97.3,74.6 180 top
U$559  ONE_PAD  [1X01]  97.3,89.84 180 top
U$560  ONE_PAD  [1X01]  97.3,77.14 180 top
U$561  ONE_PAD  [1X01]  97.3,92.38 180 top
U$562  ONE_PAD  [1X01]  97.3,79.68 180 top
U$563  ONE_PAD  [1X01]  69.36,82.22 180 top
U$564  ONE_PAD  [1X01]  69.36,69.52 180 top
U$565  ONE_PAD  [1X01]  69.36,84.76 180 top
U$566  ONE_PAD  [1X01]  69.36,72.06 180 top
U$567  ONE_PAD  [1X01]  69.36,87.3 180 top
U$568  ONE_PAD  [1X01]  69.36,74.6 180 top
U$569  ONE_PAD  [1X01]  69.36,89.84 180 top
U$570  ONE_PAD  [1X01]  69.36,77.14 180 top
U$571  ONE_PAD  [1X01]  69.36,92.38 180 top
U$572  ONE_PAD  [1X01]  69.36,79.68 180 top
U$573  ONE_PAD  [1X01]  61.43,77.14 180 top
U$574  ONE_PAD  [1X01]  61.43,79.68 180 top
U$575  ONE_PAD  [1X01]  61.43,82.22 180 top
U$576  ONE_PAD  [1X01]  61.43,84.76 180 top
U$577  ONE_PAD  [1X01]  61.43,87.3 180 top
U$578  ONE_PAD  [1X01]  61.43,89.84 180 top
U$579  ONE_PAD  [1X01]  61.43,92.38 180 top
U$580  ONE_PAD  [1X01]  58.89,84.76 180 top
U$581  ONE_PAD  [1X01]  58.89,77.14 180 top
U$582  ONE_PAD  [1X01]  58.89,87.3 270 top
U$583  ONE_PAD  [1X01]  58.89,79.68 180 top
U$584  ONE_PAD  [1X01]  58.89,89.84 180 top
U$585  ONE_PAD  [1X01]  58.89,82.22 180 top
U$586  ONE_PAD  [1X01]  58.89,92.38 180 top
U$587  ONE_PAD  [1X01]  56.35,77.14 180 top
U$588  ONE_PAD  [1X01]  53.81,77.14 180 top
U$589  ONE_PAD  [1X01]  56.35,89.84 180 top
U$590  ONE_PAD  [1X01]  56.35,79.68 180 top
U$591  ONE_PAD  [1X01]  53.81,79.68 180 top
U$592  ONE_PAD  [1X01]  56.35,92.38 180 top
U$593  ONE_PAD  [1X01]  56.35,82.22 180 top
U$594  ONE_PAD  [1X01]  53.81,82.22 180 top
U$595  ONE_PAD  [1X01]  53.81,89.84 180 top
U$596  ONE_PAD  [1X01]  56.35,84.76 180 top
U$597  ONE_PAD  [1X01]  53.81,84.76 180 top
U$598  ONE_PAD  [1X01]  53.81,92.38 180 top
U$599  ONE_PAD  [1X01]  56.35,87.3 180 top
U$600  ONE_PAD  [1X01]  53.81,87.3 180 top
U$601  ONE_PAD  [1X01]  51.27,77.14 180 top
U$602  ONE_PAD  [1X01]  48.73,77.14 180 top
U$603  ONE_PAD  [1X01]  46.19,77.14 180 top
U$604  ONE_PAD  [1X01]  43.65,77.14 180 top
U$605  ONE_PAD  [1X01]  51.27,79.68 180 top
U$606  ONE_PAD  [1X01]  48.73,79.68 180 top
U$607  ONE_PAD  [1X01]  46.19,79.68 180 top
U$608  ONE_PAD  [1X01]  43.65,79.68 180 top
U$609  ONE_PAD  [1X01]  51.27,82.22 180 top
U$610  ONE_PAD  [1X01]  48.73,82.22 180 top
U$611  ONE_PAD  [1X01]  46.19,82.22 180 top
U$612  ONE_PAD  [1X01]  43.65,82.22 180 top
U$613  ONE_PAD  [1X01]  51.27,84.76 180 top
U$614  ONE_PAD  [1X01]  48.73,84.76 180 top
U$615  ONE_PAD  [1X01]  46.19,84.76 180 top
U$616  ONE_PAD  [1X01]  43.65,84.76 180 top
U$617  ONE_PAD  [1X01]  51.27,87.3 180 top
U$618  ONE_PAD  [1X01]  48.73,87.3 180 top
U$619  ONE_PAD  [1X01]  46.19,87.3 180 top
U$620  ONE_PAD  [1X01]  43.65,87.3 180 top
U$621  ONE_PAD  [1X01]  51.27,89.84 180 top
U$622  ONE_PAD  [1X01]  48.73,89.84 180 top
U$623  ONE_PAD  [1X01]  46.19,89.84 180 top
U$624  ONE_PAD  [1X01]  43.65,89.84 180 top
U$625  ONE_PAD  [1X01]  51.27,92.38 180 top
U$626  ONE_PAD  [1X01]  48.73,92.38 180 top
U$627  ONE_PAD  [1X01]  46.19,92.38 180 top
U$628  ONE_PAD  [1X01]  43.65,92.38 180 top
U$629  ONE_PAD  [1X01]  41.11,77.14 180 top
U$630  ONE_PAD  [1X01]  38.57,77.14 180 top
U$631  ONE_PAD  [1X01]  41.11,89.84 180 top
U$632  ONE_PAD  [1X01]  41.11,79.68 180 top
U$633  ONE_PAD  [1X01]  38.57,79.68 180 top
U$634  ONE_PAD  [1X01]  41.11,92.38 180 top
U$635  ONE_PAD  [1X01]  41.11,82.22 180 top
U$636  ONE_PAD  [1X01]  38.57,82.22 180 top
U$637  ONE_PAD  [1X01]  38.57,89.84 180 top
U$638  ONE_PAD  [1X01]  41.11,84.76 180 top
U$639  ONE_PAD  [1X01]  38.57,84.76 180 top
U$640  ONE_PAD  [1X01]  38.57,92.38 180 top
U$641  ONE_PAD  [1X01]  41.11,87.3 180 top
U$642  ONE_PAD  [1X01]  38.57,87.3 180 top
U$643  GND  [1X01]  53.81,98.09 0 top
U$644  VCC  [1X01]  46.19,98.09 270 top
U$645  SDA  [1X01]  48.73,98.09 180 top
U$646  SCL  [1X01]  51.27,98.09 180 top
U$647  ONE_PAD  [1X01]  43.65,61.9 180 top
U$648  ONE_PAD  [1X01]  43.65,64.44 180 top
U$649  ONE_PAD  [1X01]  43.65,66.98 180 top
U$650  ONE_PAD  [1X01]  46.19,61.9 180 top
U$651  ONE_PAD  [1X01]  46.19,64.44 180 top
U$652  ONE_PAD  [1X01]  46.19,66.98 180 top
U$653  ONE_PAD  [1X01]  48.73,61.9 180 top
U$654  ONE_PAD  [1X01]  48.73,66.98 180 top
U$655  ONE_PAD  [1X01]  48.73,64.44 180 top
U$656  ONE_PAD  [1X01]  51.27,61.9 180 top
U$657  ONE_PAD  [1X01]  51.27,66.98 180 top
U$658  ONE_PAD  [1X01]  51.27,64.44 180 top
U$659  ONE_PAD  [1X01]  53.81,64.44 180 top
U$660  ONE_PAD  [1X01]  53.81,61.9 180 top
U$661  ONE_PAD  [1X01]  53.81,66.98 180 top
U$662  ONE_PAD  [1X01]  56.35,64.44 180 top
U$663  ONE_PAD  [1X01]  56.35,61.9 180 top
U$664  ONE_PAD  [1X01]  56.35,66.98 180 top
U$665  ONE_PAD  [1X01]  61.43,74.6 270 top
U$666  ONE_PAD  [1X01]  61.43,72.06 270 top
U$667  ONE_PAD  [1X01]  61.43,69.52 270 top
U$668  ONE_PAD  [1X01]  43.65,69.52 270 top
U$669  ONE_PAD  [1X01]  58.89,74.6 270 top
U$670  ONE_PAD  [1X01]  58.89,72.06 270 top
U$671  ONE_PAD  [1X01]  56.35,74.6 270 top
U$672  ONE_PAD  [1X01]  56.35,72.06 270 top
U$673  ONE_PAD  [1X01]  56.35,69.52 270 top
U$674  ONE_PAD  [1X01]  38.57,69.52 270 top
U$675  ONE_PAD  [1X01]  53.81,74.6 270 top
U$676  ONE_PAD  [1X01]  53.81,72.06 270 top
U$677  ONE_PAD  [1X01]  53.81,69.52 270 top
U$678  ONE_PAD  [1X01]  41.11,72.06 270 top
U$679  ONE_PAD  [1X01]  51.27,74.6 270 top
U$680  ONE_PAD  [1X01]  51.27,72.06 270 top
U$681  ONE_PAD  [1X01]  51.27,69.52 270 top
U$682  ONE_PAD  [1X01]  38.57,72.06 270 top
U$683  ONE_PAD  [1X01]  48.73,74.6 270 top
U$684  ONE_PAD  [1X01]  48.73,72.06 270 top
U$685  ONE_PAD  [1X01]  48.73,69.52 270 top
U$686  ONE_PAD  [1X01]  41.11,74.6 270 top
U$687  ONE_PAD  [1X01]  46.19,74.6 270 top
U$688  ONE_PAD  [1X01]  46.19,72.06 270 top
U$689  ONE_PAD  [1X01]  46.19,69.52 270 top
U$690  ONE_PAD  [1X01]  38.57,74.6 270 top
U$691  ONE_PAD  [1X01]  43.65,74.6 270 top
U$692  ONE_PAD  [1X01]  43.65,72.06 270 top
U$693  DECOUPLING_CAP  [DECOUPLING_CAP]  39.2,59.36 180 top
U$694  RESISTOR  [AXIAL-0.3]  58.89,65.71 90 top
U$695  RESISTOR  [AXIAL-0.3]  41.11,65.71 90 top
U$696  ONE_PAD  [1X01]  63.97,82.22 180 top
U$697  ONE_PAD  [1X01]  63.97,69.52 180 top
U$698  ONE_PAD  [1X01]  63.97,84.76 180 top
U$699  ONE_PAD  [1X01]  63.97,72.06 180 top
U$700  ONE_PAD  [1X01]  63.97,87.3 180 top
U$701  ONE_PAD  [1X01]  63.97,74.6 180 top
U$702  ONE_PAD  [1X01]  63.97,89.84 180 top
U$703  ONE_PAD  [1X01]  63.97,77.14 180 top
U$704  ONE_PAD  [1X01]  63.97,92.38 180 top
U$705  ONE_PAD  [1X01]  63.97,79.68 180 top
U$706  ONE_PAD  [1X01]  36.03,82.22 180 top
U$707  ONE_PAD  [1X01]  36.03,69.52 180 top
U$708  ONE_PAD  [1X01]  36.03,84.76 180 top
U$709  ONE_PAD  [1X01]  36.03,72.06 180 top
U$710  ONE_PAD  [1X01]  36.03,87.3 180 top
U$711  ONE_PAD  [1X01]  36.03,74.6 180 top
U$712  ONE_PAD  [1X01]  36.03,89.84 180 top
U$713  ONE_PAD  [1X01]  36.03,77.14 180 top
U$714  ONE_PAD  [1X01]  36.03,92.38 180 top
U$715  ONE_PAD  [1X01]  36.03,79.68 180 top
U$716  ONE_PAD  [1X01]  28.1,77.14 180 top
U$717  ONE_PAD  [1X01]  28.1,79.68 180 top
U$718  ONE_PAD  [1X01]  28.1,82.22 180 top
U$719  ONE_PAD  [1X01]  28.1,84.76 180 top
U$720  ONE_PAD  [1X01]  28.1,87.3 180 top
U$721  ONE_PAD  [1X01]  28.1,89.84 180 top
U$722  ONE_PAD  [1X01]  28.1,92.38 180 top
U$723  ONE_PAD  [1X01]  25.56,84.76 180 top
U$724  ONE_PAD  [1X01]  25.56,77.14 180 top
U$725  ONE_PAD  [1X01]  25.56,87.3 270 top
U$726  ONE_PAD  [1X01]  25.56,79.68 180 top
U$727  ONE_PAD  [1X01]  25.56,89.84 180 top
U$728  ONE_PAD  [1X01]  25.56,82.22 180 top
U$729  ONE_PAD  [1X01]  25.56,92.38 180 top
U$730  ONE_PAD  [1X01]  23.02,77.14 180 top
U$731  ONE_PAD  [1X01]  20.48,77.14 180 top
U$732  ONE_PAD  [1X01]  23.02,89.84 180 top
U$733  ONE_PAD  [1X01]  23.02,79.68 180 top
U$734  ONE_PAD  [1X01]  20.48,79.68 180 top
U$735  ONE_PAD  [1X01]  23.02,92.38 180 top
U$736  ONE_PAD  [1X01]  23.02,82.22 180 top
U$737  ONE_PAD  [1X01]  20.48,82.22 180 top
U$738  ONE_PAD  [1X01]  20.48,89.84 180 top
U$739  ONE_PAD  [1X01]  23.02,84.76 180 top
U$740  ONE_PAD  [1X01]  20.48,84.76 180 top
U$741  ONE_PAD  [1X01]  20.48,92.38 180 top
U$742  ONE_PAD  [1X01]  23.02,87.3 180 top
U$743  ONE_PAD  [1X01]  20.48,87.3 180 top
U$744  ONE_PAD  [1X01]  17.94,77.14 180 top
U$745  ONE_PAD  [1X01]  15.4,77.14 180 top
U$746  ONE_PAD  [1X01]  12.86,77.14 180 top
U$747  ONE_PAD  [1X01]  10.32,77.14 180 top
U$748  ONE_PAD  [1X01]  17.94,79.68 180 top
U$749  ONE_PAD  [1X01]  15.4,79.68 180 top
U$750  ONE_PAD  [1X01]  12.86,79.68 180 top
U$751  ONE_PAD  [1X01]  10.32,79.68 180 top
U$752  ONE_PAD  [1X01]  17.94,82.22 180 top
U$753  ONE_PAD  [1X01]  15.4,82.22 180 top
U$754  ONE_PAD  [1X01]  12.86,82.22 180 top
U$755  ONE_PAD  [1X01]  10.32,82.22 180 top
U$756  ONE_PAD  [1X01]  17.94,84.76 180 top
U$757  ONE_PAD  [1X01]  15.4,84.76 180 top
U$758  ONE_PAD  [1X01]  12.86,84.76 180 top
U$759  ONE_PAD  [1X01]  10.32,84.76 180 top
U$760  ONE_PAD  [1X01]  17.94,87.3 180 top
U$761  ONE_PAD  [1X01]  15.4,87.3 180 top
U$762  ONE_PAD  [1X01]  12.86,87.3 180 top
U$763  ONE_PAD  [1X01]  10.32,87.3 180 top
U$764  ONE_PAD  [1X01]  17.94,89.84 180 top
U$765  ONE_PAD  [1X01]  15.4,89.84 180 top
U$766  ONE_PAD  [1X01]  12.86,89.84 180 top
U$767  ONE_PAD  [1X01]  10.32,89.84 180 top
U$768  ONE_PAD  [1X01]  17.94,92.38 180 top
U$769  ONE_PAD  [1X01]  15.4,92.38 180 top
U$770  ONE_PAD  [1X01]  12.86,92.38 180 top
U$771  ONE_PAD  [1X01]  10.32,92.38 180 top
U$772  ONE_PAD  [1X01]  7.78,77.14 180 top
U$773  ONE_PAD  [1X01]  5.24,77.14 180 top
U$774  ONE_PAD  [1X01]  7.78,89.84 180 top
U$775  ONE_PAD  [1X01]  7.78,79.68 180 top
U$776  ONE_PAD  [1X01]  5.24,79.68 180 top
U$777  ONE_PAD  [1X01]  7.78,92.38 180 top
U$778  ONE_PAD  [1X01]  7.78,82.22 180 top
U$779  ONE_PAD  [1X01]  5.24,82.22 180 top
U$780  ONE_PAD  [1X01]  5.24,89.84 180 top
U$781  ONE_PAD  [1X01]  7.78,84.76 180 top
U$782  ONE_PAD  [1X01]  5.24,84.76 180 top
U$783  ONE_PAD  [1X01]  5.24,92.38 180 top
U$784  ONE_PAD  [1X01]  7.78,87.3 180 top
U$785  ONE_PAD  [1X01]  5.24,87.3 180 top
U$786  GND  [1X01]  20.48,98.09 0 top
U$787  VCC  [1X01]  12.86,98.09 270 top
U$788  SDA  [1X01]  15.4,98.09 180 top
U$789  SCL  [1X01]  17.94,98.09 180 top
U$790  ONE_PAD  [1X01]  10.32,61.9 180 top
U$791  ONE_PAD  [1X01]  10.32,64.44 180 top
U$792  ONE_PAD  [1X01]  10.32,66.98 180 top
U$793  ONE_PAD  [1X01]  12.86,61.9 180 top
U$794  ONE_PAD  [1X01]  12.86,64.44 180 top
U$795  ONE_PAD  [1X01]  12.86,66.98 180 top
U$796  ONE_PAD  [1X01]  15.4,61.9 180 top
U$797  ONE_PAD  [1X01]  15.4,66.98 180 top
U$798  ONE_PAD  [1X01]  15.4,64.44 180 top
U$799  ONE_PAD  [1X01]  17.94,61.9 180 top
U$800  ONE_PAD  [1X01]  17.94,66.98 180 top
U$801  ONE_PAD  [1X01]  17.94,64.44 180 top
U$802  ONE_PAD  [1X01]  20.48,64.44 180 top
U$803  ONE_PAD  [1X01]  20.48,61.9 180 top
U$804  ONE_PAD  [1X01]  20.48,66.98 180 top
U$805  ONE_PAD  [1X01]  23.02,64.44 180 top
U$806  ONE_PAD  [1X01]  23.02,61.9 180 top
U$807  ONE_PAD  [1X01]  23.02,66.98 180 top
U$808  ONE_PAD  [1X01]  28.1,74.6 270 top
U$809  ONE_PAD  [1X01]  28.1,72.06 270 top
U$810  ONE_PAD  [1X01]  28.1,69.52 270 top
U$811  ONE_PAD  [1X01]  10.32,69.52 270 top
U$812  ONE_PAD  [1X01]  25.56,74.6 270 top
U$813  ONE_PAD  [1X01]  25.56,72.06 270 top
U$814  ONE_PAD  [1X01]  23.02,74.6 270 top
U$815  ONE_PAD  [1X01]  23.02,72.06 270 top
U$816  ONE_PAD  [1X01]  23.02,69.52 270 top
U$817  ONE_PAD  [1X01]  5.24,69.52 270 top
U$818  ONE_PAD  [1X01]  20.48,74.6 270 top
U$819  ONE_PAD  [1X01]  20.48,72.06 270 top
U$820  ONE_PAD  [1X01]  20.48,69.52 270 top
U$821  ONE_PAD  [1X01]  7.78,72.06 270 top
U$822  ONE_PAD  [1X01]  17.94,74.6 270 top
U$823  ONE_PAD  [1X01]  17.94,72.06 270 top
U$824  ONE_PAD  [1X01]  17.94,69.52 270 top
U$825  ONE_PAD  [1X01]  5.24,72.06 270 top
U$826  ONE_PAD  [1X01]  15.4,74.6 270 top
U$827  ONE_PAD  [1X01]  15.4,72.06 270 top
U$828  ONE_PAD  [1X01]  15.4,69.52 270 top
U$829  ONE_PAD  [1X01]  7.78,74.6 270 top
U$830  ONE_PAD  [1X01]  12.86,74.6 270 top
U$831  ONE_PAD  [1X01]  12.86,72.06 270 top
U$832  ONE_PAD  [1X01]  12.86,69.52 270 top
U$833  ONE_PAD  [1X01]  5.24,74.6 270 top
U$834  ONE_PAD  [1X01]  10.32,74.6 270 top
U$835  ONE_PAD  [1X01]  10.32,72.06 270 top
U$836  DECOUPLING_CAP  [DECOUPLING_CAP]  5.88,59.36 180 top
U$837  RESISTOR  [AXIAL-0.3]  25.56,65.71 90 top
U$838  RESISTOR  [AXIAL-0.3]  7.78,65.71 90 top
U$839  ONE_PAD  [1X01]  30.64,82.22 180 top
U$840  ONE_PAD  [1X01]  30.64,69.52 180 top
U$841  ONE_PAD  [1X01]  30.64,84.76 180 top
U$842  ONE_PAD  [1X01]  30.64,72.06 180 top
U$843  ONE_PAD  [1X01]  30.64,87.3 180 top
U$844  ONE_PAD  [1X01]  30.64,74.6 180 top
U$845  ONE_PAD  [1X01]  30.64,89.84 180 top
U$846  ONE_PAD  [1X01]  30.64,77.14 180 top
U$847  ONE_PAD  [1X01]  30.64,92.38 180 top
U$848  ONE_PAD  [1X01]  30.64,79.68 180 top
U$849  ONE_PAD  [1X01]  2.7,82.22 180 top
U$850  ONE_PAD  [1X01]  2.7,69.52 180 top
U$851  ONE_PAD  [1X01]  2.7,84.76 180 top
U$852  ONE_PAD  [1X01]  2.7,72.06 180 top
U$853  ONE_PAD  [1X01]  2.7,87.3 180 top
U$854  ONE_PAD  [1X01]  2.7,74.6 180 top
U$855  ONE_PAD  [1X01]  2.7,89.84 180 top
U$856  ONE_PAD  [1X01]  2.7,77.14 180 top
U$857  ONE_PAD  [1X01]  2.7,92.38 180 top
U$858  ONE_PAD  [1X01]  2.7,79.68 180 top

## Library data of the parts
HELLO HELLO1-HELLO5 POWER POWER1-POWER5 U$1-U$858 = BadgeParts
IC1-IC6 = BadgeParts; ARROW_PART_NUMBER: ATTINY85-20SU; ARROW_PRICE/STOCK: https://www.arrow.com/en/products/attiny85-20su/microchip-technology; DESCRIPTION: MICROCHIP - ATTINY85-20SU - MICROCONTROLLER MCU, 8 BIT, ATTINY, 20MHZ, SOIC-8; HEIGHT: 2.16mm; MANUFACTURER_NAME: Microchip; MANUFACTURER_PART_NUMBER: ATTINY85-20SU; RS_PART_NUMBER: 1331674; RS_PRICE/STOCK: http://uk.rs-online.com/web/p/products/1331674
J1-J6 = BadgeParts; ARROW_PART_NUMBER: M20-9980346; ARROW_PRICE/STOCK: http://uk.rs-online.com/web/p/products/7457046P; DESCRIPTION: 03+03 DIL Vertical Pin Header HARWIN M20 Series, 2.54mm Pitch 6 Way 2 Row Straight PCB Header, Solder Termination, 3A; HEIGHT: 8.68mm; MANUFACTURER_NAME: HARWIN; MANUFACTURER_PART_NUMBER: M20-9980346; RS_PART_NUMBER: 7457046P; RS_PRICE/STOCK: http://uk.rs-online.com/web/p/products/7457046P

## Nets
GND [GND]: HELLO.NEG IC1.GND J1.GND POWER.NEG U$71.P$1 U$99.P$1 U$100.P$1 U$123.P$1 U$124.P$1 U$125.P$1 U$128.P$1 U$129.P$1 U$130.P$1 U$131.P$1 U$132.P$1 U$133.P$1
GND1 [GND]: HELLO1.NEG IC2.GND J2.GND POWER1.NEG U$214.P$1 U$264.P$1 U$267.P$1 U$268.P$1 U$269.P$1 U$270.P$1 U$271.P$1 U$272.P$1 U$273.P$1 U$274.P$1 U$275.P$1 U$276.P$1
GND2 [GND]: HELLO2.NEG IC3.GND J3.GND POWER2.NEG U$357.P$1 U$407.P$1 U$410.P$1 U$411.P$1 U$412.P$1 U$413.P$1 U$414.P$1 U$415.P$1 U$416.P$1 U$417.P$1 U$418.P$1 U$419.P$1
GND3 [GND]: HELLO3.NEG IC4.GND J4.GND POWER3.NEG U$500.P$1 U$550.P$1 U$553.P$1 U$554.P$1 U$555.P$1 U$556.P$1 U$557.P$1 U$558.P$1 U$559.P$1 U$560.P$1 U$561.P$1 U$562.P$1
GND6 [GND]: HELLO4.NEG IC5.GND J5.GND POWER4.NEG U$643.P$1 U$693.P$1 U$696.P$1 U$697.P$1 U$698.P$1 U$699.P$1 U$700.P$1 U$701.P$1 U$702.P$1 U$703.P$1 U$704.P$1 U$705.P$1
GND7 [GND]: HELLO5.NEG IC6.GND J6.GND POWER5.NEG U$786.P$1 U$836.P$1 U$839.P$1 U$840.P$1 U$841.P$1 U$842.P$1 U$843.P$1 U$844.P$1 U$845.P$1 U$846.P$1 U$847.P$1 U$848.P$1
N$1: POWER.POS U$126.P$3
N$2: HELLO.POS U$127.P$3
N$3: POWER1.POS U$265.P$3
N$4: HELLO1.POS U$266.P$3
N$5: POWER2.POS U$408.P$3
N$6: HELLO2.POS U$409.P$3
N$7: POWER3.POS U$551.P$3
N$8: HELLO3.POS U$552.P$3
N$9: POWER4.POS U$694.P$3
N$10: HELLO4.POS U$695.P$3
N$11: POWER5.POS U$837.P$3
N$12: HELLO5.POS U$838.P$3
PB0: IC1.PB0 J1.0/MOSI/SDA U$72.P$1 U$75.P$1 U$76.P$1 U$77.P$1 U$127.P$4
PB1: IC1.PB1 J1.1/MISO U$78.P$1 U$79.P$1 U$80.P$1
PB2: IC1.PB2 J1.2/SCK/SCL U$73.P$1 U$81.P$1 U$82.P$1 U$83.P$1
PB3: IC1.PB3 U$84.P$1 U$85.P$1 U$86.P$1
PB4: IC1.PB4 U$87.P$1 U$88.P$1 U$89.P$1
PB5: IC1.PB5 J1.5/RST U$90.P$1 U$91.P$1 U$92.P$1
PB6: IC2.PB0 J2.0/MOSI/SDA U$216.P$1 U$218.P$1 U$219.P$1 U$220.P$1 U$266.P$4
PB7: IC2.PB3 U$227.P$1 U$228.P$1 U$229.P$1
PB8: IC2.PB4 U$230.P$1 U$231.P$1 U$232.P$1
PB9: IC2.PB2 J2.2/SCK/SCL U$217.P$1 U$224.P$1 U$225.P$1 U$226.P$1
PB10: IC2.PB5 J2.5/RST U$233.P$1 U$234.P$1 U$235.P$1
PB11: IC2.PB1 J2.1/MISO U$221.P$1 U$222.P$1 U$223.P$1
PB12: IC3.PB0 J3.0/MOSI/SDA U$359.P$1 U$361.P$1 U$362.P$1 U$363.P$1 U$409.P$4
PB13: IC3.PB3 U$370.P$1 U$371.P$1 U$372.P$1
PB14: IC3.PB4 U$373.P$1 U$374.P$1 U$375.P$1
PB15: IC3.PB2 J3.2/SCK/SCL U$360.P$1 U$367.P$1 U$368.P$1 U$369.P$1
PB16: IC3.PB5 J3.5/RST U$376.P$1 U$377.P$1 U$378.P$1
PB17: IC3.PB1 J3.1/MISO U$364.P$1 U$365.P$1 U$366.P$1
PB18: IC4.PB0 J4.0/MOSI/SDA U$502.P$1 U$504.P$1 U$505.P$1 U$506.P$1 U$552.P$4
PB19: IC4.PB3 U$513.P$1 U$514.P$1 U$515.P$1
PB20: IC4.PB4 U$516.P$1 U$517.P$1 U$518.P$1
PB21: IC4.PB2 J4.2/SCK/SCL U$503.P$1 U$510.P$1 U$511.P$1 U$512.P$1
PB22: IC4.PB5 J4.5/RST U$519.P$1 U$520.P$1 U$521.P$1
PB23: IC4.PB1 J4.1/MISO U$507.P$1 U$508.P$1 U$509.P$1
PB24: IC5.PB0 J5.0/MOSI/SDA U$645.P$1 U$647.P$1 U$648.P$1 U$649.P$1 U$695.P$4
PB25: IC5.PB3 U$656.P$1 U$657.P$1 U$658.P$1
PB26: IC5.PB4 U$659.P$1 U$660.P$1 U$661.P$1
PB27: IC5.PB2 J5.2/SCK/SCL U$646.P$1 U$653.P$1 U$654.P$1 U$655.P$1
PB30: IC5.PB5 J5.5/RST U$662.P$1 U$663.P$1 U$664.P$1
PB31: IC5.PB1 J5.1/MISO U$650.P$1 U$651.P$1 U$652.P$1
PB32: IC6.PB0 J6.0/MOSI/SDA U$788.P$1 U$790.P$1 U$791.P$1 U$792.P$1 U$838.P$4
PB33: IC6.PB3 U$799.P$1 U$800.P$1 U$801.P$1
PB36: IC6.PB4 U$802.P$1 U$803.P$1 U$804.P$1
PB37: IC6.PB2 J6.2/SCK/SCL U$789.P$1 U$796.P$1 U$797.P$1 U$798.P$1
PB38: IC6.PB5 J6.5/RST U$805.P$1 U$806.P$1 U$807.P$1
PB39: IC6.PB1 J6.1/MISO U$793.P$1 U$794.P$1 U$795.P$1
VCC [VCC]: IC1.VCC J1.VCC U$74.P$1 U$123.P$2 U$126.P$4 U$134.P$1 U$135.P$1 U$136.P$1 U$137.P$1 U$138.P$1 U$139.P$1 U$140.P$1 U$141.P$1 U$142.P$1 U$143.P$1
VCC1 [VCC]: IC2.VCC J2.VCC U$215.P$1 U$264.P$2 U$265.P$4 U$277.P$1 U$278.P$1 U$279.P$1 U$280.P$1 U$281.P$1 U$282.P$1 U$283.P$1 U$284.P$1 U$285.P$1 U$286.P$1
VCC2 [VCC]: IC3.VCC J3.VCC U$358.P$1 U$407.P$2 U$408.P$4 U$420.P$1 U$421.P$1 U$422.P$1 U$423.P$1 U$424.P$1 U$425.P$1 U$426.P$1 U$427.P$1 U$428.P$1 U$429.P$1
VCC3 [VCC]: IC4.VCC J4.VCC U$501.P$1 U$550.P$2 U$551.P$4 U$563.P$1 U$564.P$1 U$565.P$1 U$566.P$1 U$567.P$1 U$568.P$1 U$569.P$1 U$570.P$1 U$571.P$1 U$572.P$1
VCC4 [VCC]: IC5.VCC J5.VCC U$644.P$1 U$693.P$2 U$694.P$4 U$706.P$1 U$707.P$1 U$708.P$1 U$709.P$1 U$710.P$1 U$711.P$1 U$712.P$1 U$713.P$1 U$714.P$1 U$715.P$1
VCC5 [VCC]: IC6.VCC J6.VCC U$787.P$1 U$836.P$2 U$837.P$4 U$849.P$1 U$850.P$1 U$851.P$1 U$852.P$1 U$853.P$1 U$854.P$1 U$855.P$1 U$856.P$1 U$857.P$1 U$858.P$1